# EAGLE board Flex (EAGLE 6.6.0)
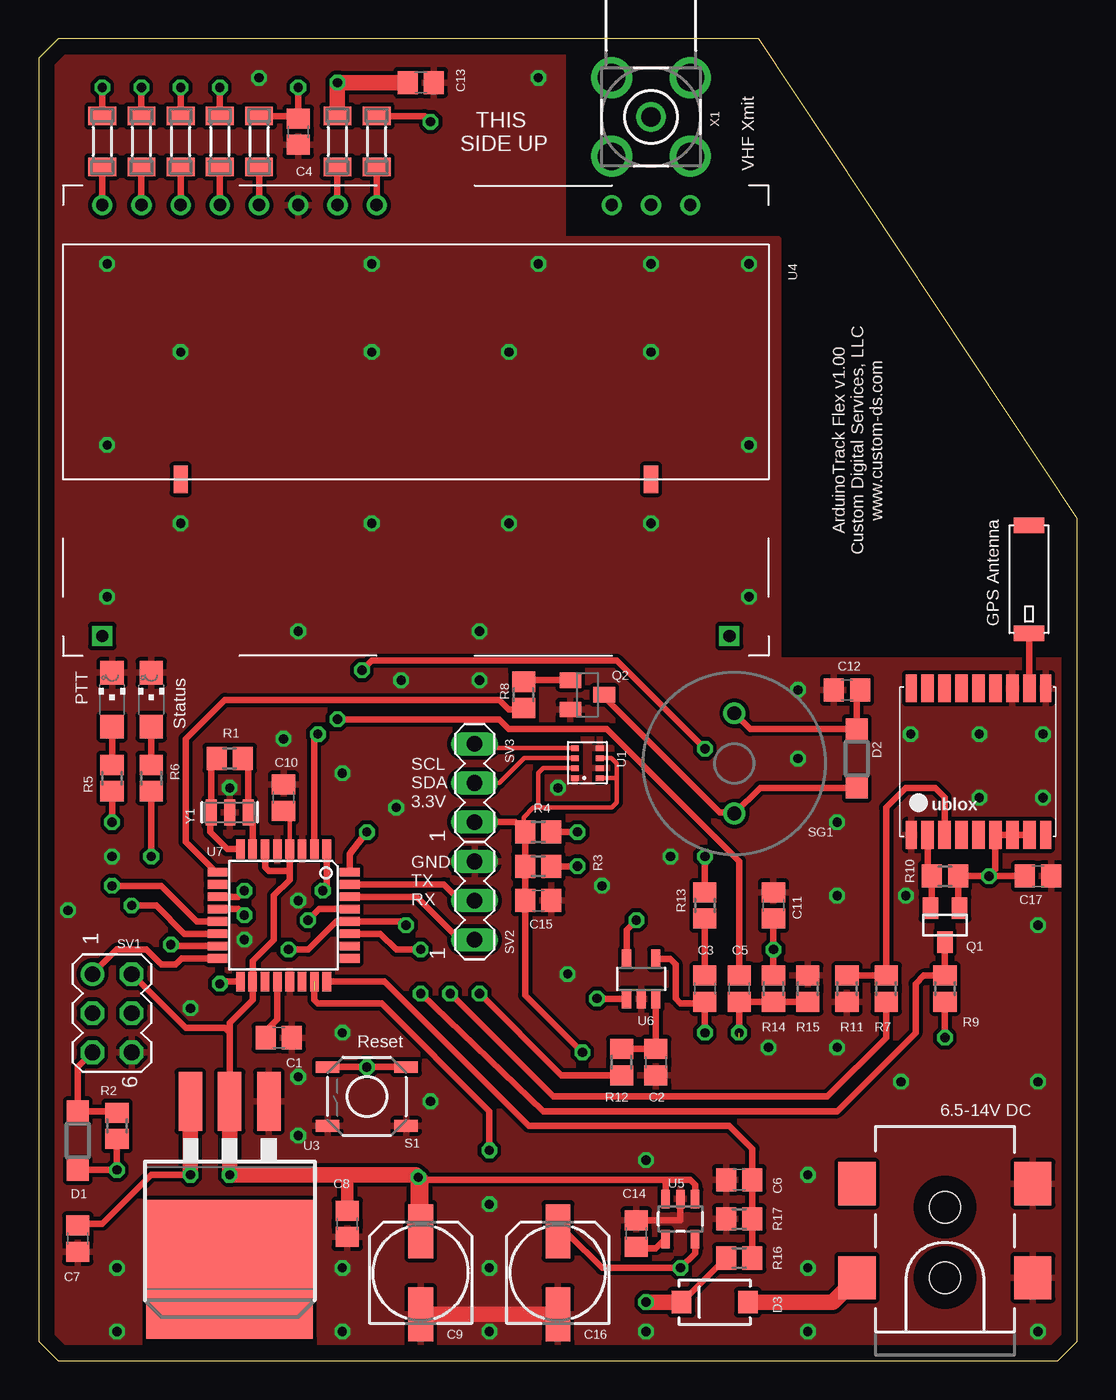
[diagram p0: board, top side]
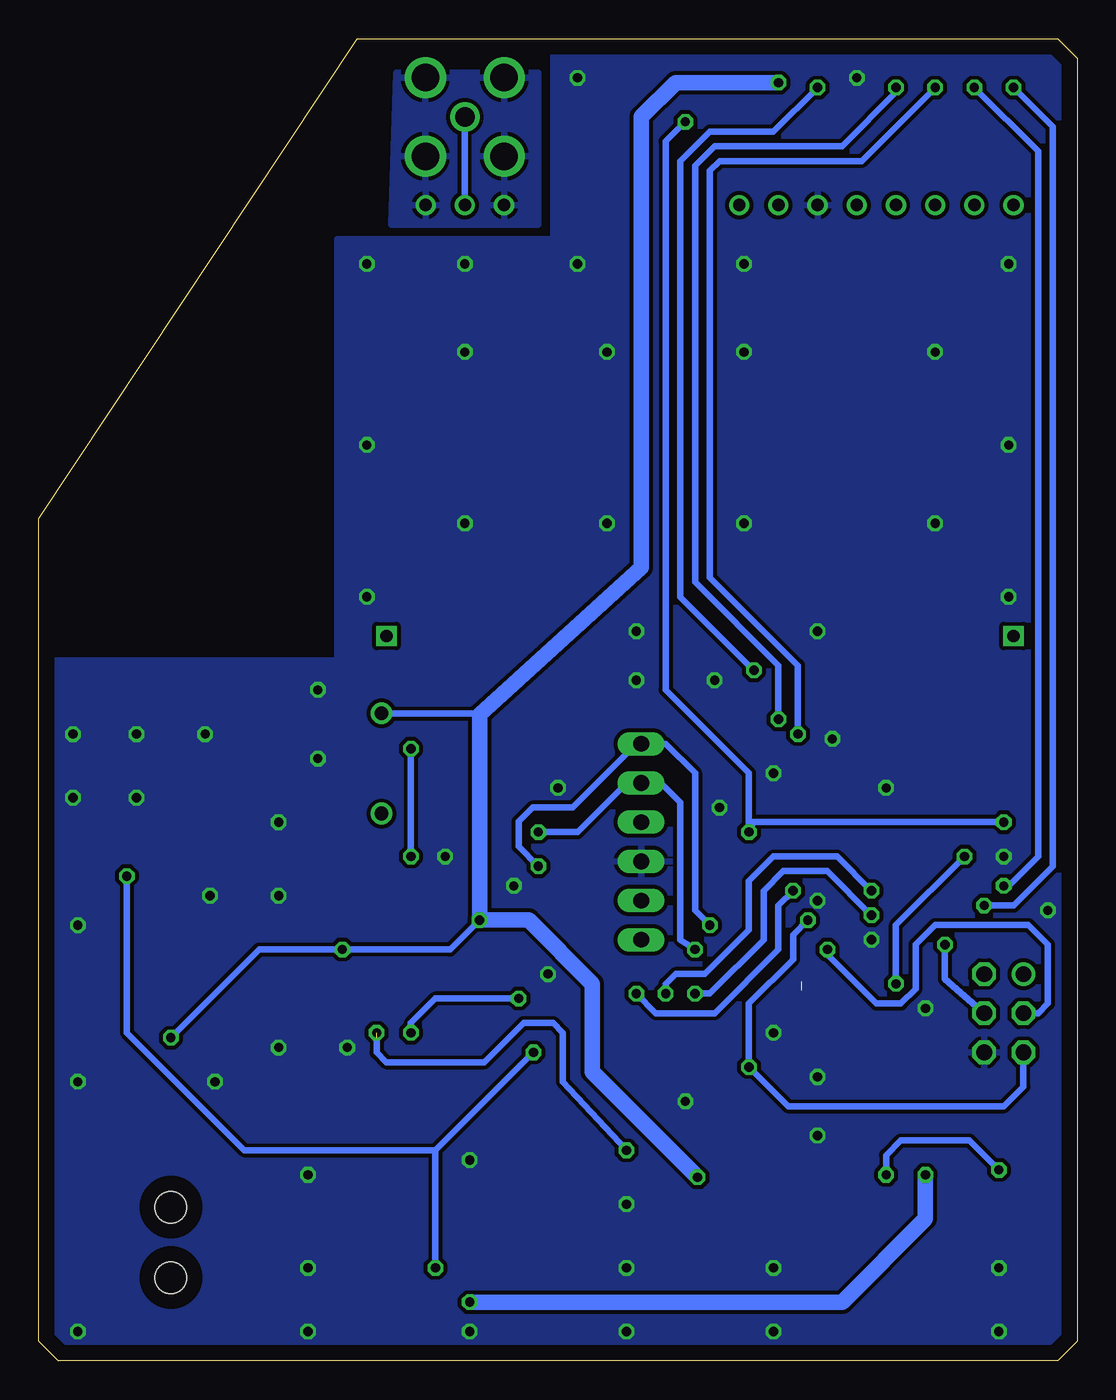
[diagram p1: board, bottom side, seen from below]

Size 67.31 x 85.72 mm. Coordinates in mm from the lower left corner, seen from the top.
Outline: 67.31,1.27 66.04,0 1.27,0 0,1.27 0,84.45 1.27,85.72 46.67,85.72 67.31,54.61 67.31,1.27
Copper layers (1*16): Top 0.035mm / dielectric 1.5mm / Bottom 0.035mm
Design rules "default *": minimum track width 10mil, minimum drill 23mil, track to track 10mil, track to pad 10mil, pad to pad 8mil, via to via 10mil, smd to smd 8mil, copper to edge 40mil, drill to drill 8mil, minimum pad ring 10mil, minimum via ring 8mil, stop-mask expansion 4mil, vias tented up to drill 0mil, thermal gap 10mil
Net classes: 1 Power: width 0.127 mm, clearance 0.025 mm

## Footprints (pad centres in the part's own frame; a part is rotated, then mirrored left to right if it is on the bottom)
1575AT43A40 = smd 1 x 2: FEED 0.5,-1; NC 7.5,-1
C0805 = smd 1.3 x 1.5: 1 -0.85,0; 2 0.85,0
153CLV-0605 = smd 3.5 x 1.6: + 2.7,0; - -2.7,0
SOD123 = smd 1.4 x 1.4: A 1.9,0; C -1.9,0
SMA-DIODE = smd 1.27 x 1.47: A -2.15,0; C 2.15,0
POWER_JACK_SMD = smd 2.8 x 2.4: GND 0,-5.7; P$4 6.1,-5.7; VIN0 0,5.7; VIN1 6.1,5.7 | hole 2.032: 0,0; 4.572,0
SM-1206 = smd 1.2 x 1.8: 1 -1.65,0; 2 1.65,0
CHIPLED_1206 = smd 1.5 x 1.5: A 0,-1.75; C 0,1.75
SOT23 = smd 1 x 1.4: 1 -0.95,-1.1; 2 0.95,-1.1; 3 0,1.1
SOT23-BEC = smd 1 x 1.4: B -0.95,-1.1; C 0,1.1; E 0.95,-1.1
R0805 = smd 1.3 x 1.5: 1 -0.85,0; 2 0.85,0
TACTILE_SWITCH_SMD = smd 1.524 x 0.762: 1 -2.54,1.905; 2 2.54,1.905; 3 -2.54,-1.905; 4 2.54,-1.905
BUZZER-12MM-NS = drill 0.9: + 3.25,0; - -3.25,0
MA03-2 = drill 1.016: 1 -2.54,-1.27 | drill 1.016 octagon: 2 -2.54,1.27; 3 0,-1.27; 4 0,1.27; 5 2.54,-1.27; 6 2.54,1.27
MA03-1 = drill 1.016 long: 1 -2.54,0; 2 0,0; 3 2.54,0
BMP280 = smd 0.5 x 0.35: P$1 0.8,0; P$2 0.8,-0.65; P$3 0.8,-1.3; P$4 0.8,-1.95; P$5 -0.8,-1.95; P$6 -0.8,-1.3; P$7 -0.8,-0.65; P$8 -0.8,0
UBLOX_MAX = smd 1.8 x 0.7: 1_GND 4.95,-4.4; 9_V_RESET 4.95,4.3; 10_GND -4.55,4.3; 18_RESERVED -4.55,-4.4 | smd 1.8 x 0.8: 2_TXD1 4.95,-3.35; 3_RXD1 4.95,-2.25; 4_TIMEPULSE 4.95,-1.15; 5_EXTINT0 4.95,-0.05; 6_V_BCKP 4.95,1.05; 7_VCC_IO 4.95,2.15; 8_VCC 4.95,3.25; 11_RF_IN -4.55,3.25; 12_GND -4.55,2.15; 13_ANTON -4.55,1.05; 14_VCC_RF -4.55,-0.05; 15_RESERVED -4.55,-1.15; 16_SDA2 -4.55,-2.25; 17_SCL2 -4.55,-3.35
TO263 = smd 1.524 x 3.81: 1 -2.54,-8.255; 2 0,-8.255; 3 2.54,-8.255 | smd 10.8 x 9: 4 0,2.635
RADIOMETRIX-HX1-CUSTOM = drill 0.8: ANTENNA -15.24,-12.7; ANTENNA_GND1 -17.78,-12.7; ANTENNA_GND2 -12.7,-12.7; GND 7.62,-12.7; POWER_SAVE 15.24,-12.7; PTT 2.54,-12.7; RX_AUDIO 12.7,-12.7; RX_DATA 17.78,-12.7; TX_AUDIO 10.16,-12.7; TX_DATA 20.32,-12.7; VCC 5.08,-12.7 | smd 0.914 x 1.778: N/C1 -15.24,5.08; N/C2 15.24,5.08 | drill 0.8 square: N/C3 -20.32,15.24; N/C4 20.32,15.24
SOT23-5 = smd 0.55 x 1.2: 1 -0.95,-1.3; 2 0,-1.3; 3 0.95,-1.3; 4 0.95,1.3; 5 -0.95,1.3
SOT23-5' = smd 0.6 x 1.2: 1 -0.95,-1.306; 2 0,-1.306; 3 0.95,-1.306; 4 0.95,1.306; 5 -0.95,1.306
TQFP32-08 = smd 1.27 x 0.559: 1 -4.293,2.8; 2 -4.293,2; 3 -4.293,1.2; 4 -4.293,0.4; 5 -4.293,-0.4; 6 -4.293,-1.2; 7 -4.293,-2; 8 -4.293,-2.8; 17 4.293,-2.8; 18 4.293,-2; 19 4.293,-1.2; 20 4.293,-0.4; 21 4.293,0.4; 22 4.293,1.2; 23 4.293,2; 24 4.293,2.8 | smd 0.559 x 1.27: 9 -2.8,-4.293; 10 -2,-4.293; 11 -1.2,-4.293; 12 -0.4,-4.293; 13 0.4,-4.293; 14 1.2,-4.293; 15 2,-4.293; 16 2.8,-4.293; 25 2.8,4.293; 26 2,4.293; 27 1.2,4.293; 28 0.4,4.293; 29 -0.4,4.293; 30 -1.2,4.293; 31 -2,4.293; 32 -2.8,4.293
BU-SMA-H = drill 1.27: 1 0,0 | drill 1.778: 2 -2.55,2.55; 3 2.55,2.55; 4 2.55,-2.55; 5 -2.55,-2.55
RESONATOR-SMD = smd 0.7 x 1.7: 1 -1.2,0; 2 0,0; 3 1.2,0

## Placement (x,y rotation side)
ANT1  GPS_ANT_SMDBAR  [1575AT43A40]  63.18,46.67 90 top
C1  .1uF  [C0805]  15.56,20.95 0 top
C2  10nF  [C0805]  40.01,19.37 270 top
C3  .1uF  [C0805]  43.18,24.13 90 top
C4  10nF  [C0805]  16.83,79.69 270 top
C5  .1uF  [C0805]  45.4,24.13 270 top
C6  .1uF  [C0805]  45.4,11.75 180 top
C7  .1uF  [C0805]  2.54,7.94 270 top
C8  .1uF  [C0805]  20,8.89 270 top
C9  47uF  [153CLV-0605]  24.77,5.71 90 top
C10  .1uF  [C0805]  15.88,36.51 90 top
C11  .1uF  [C0805]  47.62,29.53 90 top
C12  .1uF  [C0805]  52.39,43.5 180 top
C13  .1uF  [C0805]  24.77,82.87 0 top
C14  .1uF  [C0805]  38.73,8.26 90 top
C15  .1uF  [C0805]  32.38,29.84 0 top
C16  47uF  [153CLV-0605]  33.66,5.71 90 top
C17  .1uF  [C0805]  64.77,31.43 0 top
D1  [SOD123]  2.54,14.29 90 top
D2  [SOD123]  53.02,39.05 270 top
D3  B220/A  [SMA-DIODE]  43.81,3.81 180 top
J1  5.5x2.1mm Barrel  [POWER_JACK_SMD]  58.74,5.4 90 top
L1  160 ohm  [SM-1206]  21.91,79.06 90 top
L2  160 ohm  [SM-1206]  9.21,79.06 270 top
L3  160 ohm  [SM-1206]  4.13,79.06 270 top
L4  160 ohm  [SM-1206]  14.29,79.06 90 top
L5  160 ohm  [SM-1206]  11.75,79.06 270 top
L6  160 ohm  [SM-1206]  6.67,79.06 270 top
L7  160 ohm  [SM-1206]  19.37,79.06 90 top
LED1  Red  [CHIPLED_1206]  4.76,42.86 0 top
LED2  Green  [CHIPLED_1206]  7.3,42.86 0 top
Q1  MOSFET-NCHANNELBSS138  [SOT23]  58.74,28.26 180 top
Q2  2N2222  [SOT23-BEC]  35.56,43.18 270 top
R1  1M  [R0805]  12.38,39.05 0 top
R2  10k  [R0805]  5.08,15.24 270 top
R3  4.7k  [R0805]  32.38,32.07 180 top
R4  4.7k  [R0805]  32.38,34.29 180 top
R5  1k  [R0805]  4.76,37.78 90 top
R6  1k  [R0805]  7.3,37.78 90 top
R7  47k  [R0805]  54.93,24.13 270 top
R8  1k  [R0805]  31.43,43.18 90 top
R9  10k  [R0805]  58.74,24.13 270 top
R10  10k  [R0805]  58.74,31.43 0 top
R11  100k  [R0805]  52.39,24.13 90 top
R12  10k  [R0805]  37.78,19.37 90 top
R13  100  [R0805]  43.18,29.53 90 top
R14  10k  [R0805]  47.62,24.13 270 top
R15  10k  [R0805]  49.85,24.13 90 top
R16  100k  [R0805]  45.4,6.67 180 top
R17  47k  [R0805]  45.4,9.21 0 top
S1  [TACTILE_SWITCH_SMD]  21.27,17.14 180 top
SG1  BUZZERNS  [BUZZER-12MM-NS]  45.09,38.73 90 top
SV1  [MA03-2]  4.76,22.54 270 top
SV2  [MA03-1]  28.26,29.84 90 top
SV3  [MA03-1]  28.26,37.47 90 top
U1  BMP280  [BMP280]  35.56,37.78 180 top
U2  UBLOX_MAX  [UBLOX_MAX]  60.96,39.05 270 top
U3  LM1086  [TO263]  12.38,8.57 180 top
U4  RADIOMETRIX-HX1-CUSTOM  [RADIOMETRIX-HX1-CUSTOM]  24.45,62.23 180 top
U5  V_REG_LDOSMD  [SOT23-5]  41.59,9.21 180 top
U6  OPA725DBV  [SOT23-5']  39.05,24.77 0 top
U7  ATMega328  [TQFP32-08]  15.88,28.89 270 top
X1  BU-SMA-H  [BU-SMA-H]  39.69,80.64 90 top
Y1  16MHz  [RESONATOR-SMD]  12.38,35.56 180 top

## Library data of the parts
ANT1 = Parts; DIGIKEY: 712-1003-1-ND
C1 C3 C5-C8 C10-C15 C17 = resistor; DIGIKEY: 311-1361-1-ND
C2 C4 = resistor; DIGIKEY: 399-1158-1-ND
C9 C16 = resistor; DIGIKEY: PCE3842CT-ND
D1 D2 = diode; DIGIKEY: 1N4148W-FDICT-ND
D3 = SparkFun-DiscreteSemi; DIGIKEY: 641-1258-1-ND; PROD_ID: DIO-09886
J1 = SparkFun-Connectors; DIGIKEY: CP-002AHPJCT-ND; PROD_ID: CONN-08106
L1-L7 = inductor-neosid; DIGIKEY: 240-2411-1-ND; OC_FARNELL: unknown; OC_NEWARK: unknown
LED1 = led; DIGIKEY: 160-1405-1-ND
LED2 = led; DIGIKEY: 160-1169-1-ND
Q1 = SparkFun-DiscreteSemi; PROD_ID: TRANS-00830
Q2 = transistor-npn; DIGIKEY: MMBT2222AFSCT-ND
R1 = resistor; DIGIKEY: 311-1.0MARCT-ND
R2 R9 R10 R12 R14 R15 = resistor; DIGIKEY: 311-10.0KCRCT-ND
R3 R4 = resistor; DIGIKEY: 311-4.7KARCT-ND
R5 R6 R8 = resistor; DIGIKEY: 311-1.0KARCT-ND
R7 R17 = resistor; DIGIKEY: 311-47.0KCRCT-ND
R11 R16 = resistor; DIGIKEY: 311-100KCRCT-ND
R13 = resistor; DIGIKEY: 311-100ARCT-ND
S1 = SparkFun-Electromechanical; DIGIKEY: CKN9104CT-ND; PROD_ID: SWCH-08247
SG1 = SparkFun-Electromechanical; DIGIKEY: 102-1155-ND
SV1 = con-lstb; OC_FARNELL: unknown; OC_NEWARK: unknown
SV2 SV3 = con-lstb; DIGIKEY: 952-2264-ND; OC_FARNELL: unknown; OC_NEWARK: unknown
U1 U4 = custom-ds
U2 = Ava; ALT-PART: UBLOX MAX-M8Q
U3 = v-reg-2; DIGIKEY: LM1086ISX-5.0/NOPBCT-ND
U5 = SparkFun-PowerIC; DIGIKEY: LP3985IM5-3.3/NOPBCT-ND
U6 = linear
U7 = atmel; DIGIKEY: ATMEGA328P-15AZCT-ND; MPN: ATMEGA8-16AU; OC_FARNELL: 9171371; OC_NEWARK: 73M8863
X1 = con-coax; DIGIKEY: CONSMA001-ND; OC_FARNELL: unknown; OC_NEWARK: unknown
Y1 = SparkFun-FreqCtrl; DIGIKEY: 478-5420-1-ND; PROD_ID: XTAL-08900

## Nets
9_V_RESET: U2.9_V_RESET
+3V3: C15.1 C16.+ C17.1 Q1.1 R3.2 R4.2 R10.2 SV3.1 U1.P$2 U1.P$6 U1.P$8 U2.6_V_BCKP U2.7_VCC_IO U2.8_VCC U5.5
+5V [Power]: C8.1 C9.+ C10.1 C11.1 C12.1 C13.1 D1.C D2.C L7.2 R2.2 R9.2 R14.1 SG1.+ SV1.2 U3.2 U5.1 U5.3 U6.5 U7.4 U7.6 U7.18
ANA-RX-AUD: C5.2 R14.2 R15.1 U7.23
AUD-ANNUNC: R8.1 U7.9
BATT-SENSE: C6.1 R16.1 R17.2 U7.24
DIG-PTT: L1.2 R5.1 U7.32
DIG-XMIT-PS: L2.1 U7.2
GND [Power]: C1.2 C2.2 C4.2 C6.2 C7.2 C8.2 C9.- C10.2 C11.2 C12.2 C13.2 C14.2 C15.2 C16.- C17.2 J1.GND J1.P$4 LED1.C LED2.C Q2.E R11.1 R15.2 R17.1 S1.1 S1.2 SV1.6 SV2.3 U1.P$1 U1.P$5 U1.P$7 U2.1_GND U2.10_GND U2.12_GND U3.1 U4.GND U5.2 U6.2 U7.3 U7.5 U7.21 Y1.2
GPS-RX: Q1.3 R9.1 U7.12
GPS-TX: R7.2 U7.11
MISO: SV1.1 U7.16
MOSI: SV1.4 U7.15
N$1: C2.1 R12.2 U6.3
N$4: U4.ANTENNA X1.1
N$5: L4.1 U4.TX_AUDIO
N$7: L1.1 U4.PTT
N$8: D3.A J1.VIN0
N$9: D2.A Q2.C SG1.-
N$10: C4.1 L4.2 R13.2
N$11: C3.1 U6.1 U6.4
N$12: L5.2 U4.RX_AUDIO
N$13: R12.1 U7.1
N$14: L2.2 U4.POWER_SAVE
N$15: Q1.2 R10.1 U2.2_TXD1
N$16: ANT1.FEED U2.11_RF_IN
N$17: R1.1 U7.8 Y1.3
N$18: R7.1 R11.2 U2.3_RXD1
N$19: L6.2 U4.RX_DATA
N$20: L3.2 U4.TX_DATA
N$23: LED1.A R5.2
N$25: LED2.A R6.2
N$27: Q2.B R8.2
N$59: C1.1 U7.20
N$60: C14.1 U5.4
N$64: R1.2 U7.7 Y1.1
RESET: D1.A R2.1 S1.3 S1.4 SV1.5 U7.29
RFGND: U4.ANTENNA_GND1 U4.ANTENNA_GND2 X1.2 X1.3 X1.4 X1.5
RX-AUDIO: C5.1 L5.1
RXD: SV2.1 U7.30
SCK: R6.1 U7.17
SCL: R3.1 SV1.3 SV3.3 U1.P$4 U7.28
SDA: R4.1 SV3.2 U1.P$3 U7.27
TX-AUDIO: C3.2 R13.1
TXD: SV2.2 U7.31
V+ [Power]: C7.1 D3.C R16.2 U3.3
VCC: L7.1 U4.VCC
XCEIVER-RX: L3.1 U7.14
XCEIVER-TX: L6.1 U7.13

## Tracks (layer width: path | path; a pad name or v marks a point on that pad's centre or on a via)
+3V3  (via drill 0.6)
  Top 0.305: U1.P$6 37.12,39.08 37.47,38.73 37.47,37.78 | 37.47,37.78 37.47,36.2 37.15,35.88 32.38,35.88 | 32.38,35.88 32.07,35.88 31.43,35.24 31.43,34.92 31.17,34.66 | U1.P$8 37.47,37.78 | U1.P$2 32.72,38.43 32.38,38.1 32.38,35.88
  Top 0.406: 33.66,8.26 C16.+ 33.81,8.26 34.29,8.26 36.51,6.03 v41.59,6.03 42.54,6.98 U5.5 | U2.8_VCC U2.7_VCC_IO U2.6_V_BCKP 62.01,31.85 v61.59,31.43 | SV3.1 30.9,34.92 31.17,34.66 R4.2 R3.2 C15.1 31.54,23.71 v35.24,20 | Q1.1 59.59,29.46 R10.2 v61.59,31.43 | C17.1 v61.59,31.43
  Bottom 0.406: v61.59,31.43 61.59,21.27 53.98,13.65 41.59,13.65 | v35.24,20 41.59,13.65 | 41.59,13.65 v41.59,6.03
+5V  (via drill 0.6)
  Top 0.305: U7.4 16.27,35.43 C10.1
  Top 0.406: U5.1 42.55,11.43 42.23,11.75 40.64,11.75 | U7.4 16.27,31.75 | 16.27,31.75 16.27,31.2 15.24,30.16 15.24,27.3 13.88,25.94 U7.18 13.88,23.4 12.38,21.91 12.38,21.27 | U7.6 14.68,32 14.92,31.75 16.27,31.75 | SG1.+ 46.12,40.95 D2.C 53.02,43.28 C12.1 | 12.38,21.27 U3.2 | SV1.2 9.53,21.59 12.06,21.59 12.38,21.27 | U6.5 38.1,27.94 v38.73,28.57 | R14.1 v47.62,26.67 C11.1 | R9.2 v58.74,20.95 | R2.2 v5.08,12.38 v5.08,12.39 D1.C | 40.64,11.75 24.77,11.75 | U5.3 40.64,11.74 40.64,11.75
  Top 0.813: C8.1 20,12.06
  Top 1.016: U3.2 v12.38,12.06 20,12.06 24.45,12.06 v24.61,11.91 | 24.37,8.81 C9.+ | v24.61,11.91 24.77,11.75 C9.+ | L7.2 v19.37,82.87 C13.1 | v24.61,11.91 24.61,8.57 C9.+
  Bottom 0.406: v12.38,12.06 12.38,13.34 11.43,14.29 6.99,14.29 v5.08,12.38 | SG1.+ 38.81,41.98 38.73,41.91 | v58.74,20.95 53.02,26.67 v47.62,26.67 40.64,26.67 v38.73,28.57
  Bottom 1.016: v19.37,82.87 26.04,82.87 28.26,80.64 28.26,51.44 38.73,41.91 v38.73,28.57 35.56,28.57 31.43,24.45 31.43,18.73 v24.61,11.91
ANA-RX-AUD  (via drill 0.6)  (2 unrouted)
  Top 0.406: R15.1 R14.2 C5.2 v45.4,21.27 | 17.88,24.04 17.88,23.4 18.1,23.18 22.23,23.18 29.21,16.19 v29.21,13.65
  Bottom 0.406: v29.21,13.65 33.34,18.1 33.34,21.27 33.97,21.91 35.88,21.91 38.42,19.37 44.77,19.37 45.4,20 45.4,20.95
AUD-ANNUNC
  Top 0.406: U7.9 11.49,31.69 9.53,33.66 9.53,40.32 12.06,42.86 29.84,42.86 30.48,42.23 31.33,42.23 R8.1 31.85,42.55
BATT-SENSE
  Top 0.406: U7.24 22.39,24.6 31.75,15.24 44.77,15.24 46.25,13.76 C6.1 R17.2 R16.1
DIG-PTT  (via drill 0.6)
  Top 0.406: U7.32 20.17,32.87 v21.27,34.29 | R5.1 v4.76,34.92 | L1.2 25.02,80.71 v25.4,80.33
  Bottom 0.406: v4.76,34.92 20.95,34.92 v21.27,34.29 21.27,38.1 26.67,43.5 26.67,79.06 v25.4,80.33
DIG-XMIT-PS  (via drill 0.6)
  Top 0.406: L2.1 v9.21,82.55 | U7.2 17.88,40.42 v18.1,40.64
  Bottom 0.406: v18.1,40.64 18.1,45.09 23.81,50.8 23.81,77.15 23.18,77.79 13.97,77.79 v9.21,82.55
GND  (via drill 0.6)
  Top 0.406: C14.2 41.59,9.11 U5.2
  Top 1.016: C16.- 25.37,3.02
  other vias: 46.04,59.37 32.38,71.12 30.48,65.41 4.45,59.37 21.59,65.41 21.59,54.29 39.69,71.12 9.21,54.29 28.57,47.31 16.83,47.31 30.48,54.29 13.34,27.3 39.69,65.41 46.04,71.12 4.45,49.53 60.96,40.64 32.38,83.19 46.04,49.53 29.21,10.16 21.59,71.12 9.21,65.41 65.09,36.51 49.21,43.5 19.68,38.1 23.5,44.13 36.51,30.8 56.2,30.16 64.77,18.1 40.96,32.7 51.75,30.16 28.57,44.13 51.75,34.92 4.76,32.7 49.85,1.91 64.77,1.91 39.37,1.91 29.21,1.91 19.68,1.91 5.08,1.91 19.68,6.03 29.21,6.03 49.85,6.03 12.38,37.15 16.83,29.84 64.77,28.26 1.91,29.21 25.4,16.83 16.83,14.61 19.68,21.27 5.08,6.03 55.88,18.1 51.75,20.32 49.21,39.05 14.29,83.19 39.69,54.29 15.88,40.32 23.18,35.88 65.09,40.64 33.66,37.15 56.52,40.64 9.84,22.86 16.83,18.41 34.29,25.08 47.31,20.32 49.85,12.06 39.37,13.02 4.45,71.12 60.96,36.51
  pour Bottom (isolate 0.254): 0.32,1.59 1.59,0.32 66.04,0.32 66.99,1.27 66.99,45.4 47.94,45.4 47.94,72.71 33.97,72.71 33.97,85.41 1.59,85.41 0.32,84.14
  pour Top (isolate 0.254): 66.99,45.4 47.94,45.4 47.94,72.71 33.97,72.71 33.97,85.41 1.59,85.41 0.32,84.14 0.32,1.59 1.59,0.32 66.04,0.32 66.99,1.27
GPS-RX  (via drill 0.6)
  Top 0.406: U7.12 12.94,29.29 v13.34,28.89 | v24.77,23.81 32.7,16.19 51.75,16.19 56.83,21.27 56.83,24.45 57.37,24.98 R9.1 Q1.3
  Bottom 0.406: v13.34,28.89 16.19,31.75 19.05,31.75 20.32,30.48 20.32,27.3 23.81,23.81 v24.77,23.81
GPS-TX  (via drill 0.6)
  Top 0.406: U7.11 12.95,30.09 v13.34,30.48 | R7.2 54.93,20.95 51.12,17.14 33.34,17.14 v26.67,23.81
  Bottom 0.406: v13.34,30.48 15.56,32.7 19.68,32.7 21.27,31.11 21.27,27.94 24.13,25.08 26.04,25.08 26.67,24.45 v26.67,23.81
MISO
  Top 0.406: U7.16 9.27,26.09 8.89,25.72 7.94,25.72 6.99,26.67 5.08,26.67 SV1.1
MOSI  (via drill 0.6)
  Top 0.406: U7.15 8.67,26.89 v8.57,26.99
  Bottom 0.406: v8.57,26.99 8.57,24.77 SV1.4
N$1
  Top 0.406: U6.3 C2.1 R12.2
N$4
  Bottom 0.406: U4.ANTENNA X1.1
N$5
  Top 0.406: L4.1 U4.TX_AUDIO
N$7
  Top 0.406: L1.1 U4.PTT
N$8
  Top 1.016: D3.A 51.45,3.81 J1.VIN0
N$9
  Top 0.406: D2.A 46.75,37.15 SG1.- 45.01,35.56 44.13,35.56 36.66,43.03 Q2.C
N$10  (via drill 0.6)
  Top 0.406: L4.2 16.66,80.71 C4.1 v16.83,82.55 | v20.95,44.77 21.59,45.4 37.47,45.4 v43.18,39.69 | v43.18,32.7 R13.2
  Bottom 0.406: v16.83,82.55 19.68,79.69 23.81,79.69 25.72,77.79 25.72,49.53 v20.95,44.77 | v43.18,39.69 v43.18,32.7
N$11  (via drill 0.6)
  Top 0.406: U6.4 40.92,26.07 41.27,25.72 41.27,23.5 41.59,23.18 43.08,23.18 C3.1 v43.18,21.27 | U6.1 36.23,23.46 v36.2,23.5
  Bottom 0.406: v36.2,23.5 41.59,23.5 43.18,21.91 v43.18,21.27
N$12
  Top 0.406: L5.2 U4.RX_AUDIO
N$13  (via drill 0.6)
  Top 0.406: U7.1 18.68,30.74 v18.41,30.48 | R12.1 33.87,18.52 v28.57,23.81
  Bottom 0.406: v18.41,30.48 19.37,29.53 19.37,26.67 23.5,22.54 27.3,22.54 v28.57,23.81
N$14
  Top 0.406: L2.2 U4.POWER_SAVE
N$15
  Top 0.406: U2.2_TXD1 57.61,31.71 R10.1 57.89,29.46 Q1.2
N$16
  Top 0.406: U2.11_RF_IN 64.21,47.15 ANT1.FEED
N$17
  Top 0.406: U7.8 12.22,33.19 11.11,34.29 11.11,35.49 Y1.3 11.18,38.7 R1.1
N$18
  Top 0.406: U2.3_RXD1 58.71,36.54 58.1,37.15 56.2,37.15 54.93,35.88 R7.1 R11.2
N$19
  Top 0.406: L6.2 U4.RX_DATA
N$20
  Top 0.406: L3.2 U4.TX_DATA
N$23
  Top 0.406: LED1.A R5.2
N$25
  Top 0.406: LED2.A R6.2
N$27
  Top 0.406: Q2.B 31.53,44.13 R8.2
N$59
  Top 0.406: U7.20 15.47,22.14 14.92,21.59 14.92,21.17 C1.1
N$60
  Top 0.406: U5.4 40.61,7.91 40.01,7.3 38.84,7.3 C14.1
N$64
  Top 0.406: U7.7 13.88,35.27 Y1.1 13.58,38.7 R1.2
RESET  (via drill 0.6)
  Top 0.406: R2.1 4.98,16.19 D1.A 2.54,19.05 SV1.5 | S1.4 v21.27,19.05 S1.3 | U7.29 18.18,29.29 v17.46,28.57
  Bottom 0.406: SV1.5 3.49,17.78 4.76,16.51 18.73,16.51 v21.27,19.05 21.27,23.18 18.41,26.04 18.41,27.62 v17.46,28.57
RFGND
  pour Bottom: 34.92,83.5 34.92,73.66 44.45,73.66 44.13,83.5
RX-AUDIO  (via drill 0.6)
  Top 0.406: C5.1 45.4,32.38 36.83,40.96 30.48,40.96 29.84,41.59 v19.37,41.59 | L5.1 v11.75,82.55
  Bottom 0.406: v11.75,82.55 11.75,82.23 15.24,78.74 23.5,78.74 24.77,77.47 24.77,50.48 19.37,45.09 v19.37,41.59
RXD
  Top 0.406: U7.30 24.52,30.09 27.3,27.3 SV2.1
SCK  (via drill 0.6)
  Top 0.406: U7.17 11.9,24.6 v11.75,24.45 | v7.3,32.7 R6.1
  Bottom 0.406: v11.75,24.45 11.75,28.26 v7.3,32.7
SCL  (via drill 0.6)
  Top 0.305: U1.P$4 28.53,39.73 SV3.3
  Top 0.406: R3.1 v34.92,32.07 | v16.19,26.67 17.46,26.67 19.29,28.49 U7.28 23.58,28.49 v23.81,28.26
  Bottom 0.406: v34.92,32.07 36.2,33.34 36.2,34.97 35.29,35.88 32.7,35.88 28.85,39.73 28.53,39.73 SV3.3 26.67,40.01 24.77,38.1 24.77,29.21 v23.81,28.26 | v16.19,26.67 16.19,26.35 13.02,23.18 11.43,23.18 10.48,24.13 10.48,26.99 9.21,28.26 3.17,28.26 1.91,26.99 1.91,23.18 2.54,22.54 SV1.3
SDA  (via drill 0.6)
  Top 0.305: U1.P$3 31.46,39.08 29.84,37.47 SV3.2
  Top 0.406: R4.1 v34.92,34.29 | U7.27 22.16,27.69 23.18,26.67 v24.77,26.67
  Bottom 0.406: v34.92,34.29 32.38,34.29 29.21,37.47 SV3.2 26.99,37.47 25.72,36.2 25.72,27.3 v24.77,26.67
TX-AUDIO
  Top 0.406: R13.1 C3.2
TXD
  Top 0.406: U7.31 26.26,30.89 27.3,29.84 SV2.2
V+  (via drill 0.6)
  Top 0.406: R16.2 44.52,6.67 D3.C | v9.84,12.06 7.3,12.06 4.13,8.89 2.64,8.89 C7.1
  Top 1.016: D3.C v39.37,3.81 | U3.3 v9.84,12.06
  Bottom 1.016: v39.37,3.81 15.24,3.81 9.84,9.21 v9.84,12.06
VCC
  Top 0.406: L7.1 U4.VCC
XCEIVER-RX  (via drill 0.6)
  Top 0.406: v4.13,82.55 L3.1 | U7.14 9.46,27.69 7.62,29.53 v6.03,29.53
  Bottom 0.406: v6.03,29.53 4.13,29.53 1.59,32.07 1.59,80.01 v4.13,82.55
XCEIVER-TX  (via drill 0.6)
  Top 0.406: v6.67,82.55 L6.1 | U7.13 10.24,28.49 7.94,30.8 v4.76,30.8
  Bottom 0.406: v4.76,30.8 4.45,30.8 2.54,32.7 2.54,78.42 v6.67,82.55

## Text on the board
tNames: THIS / SIDE UP | VHF Xmit | ArduinoTrack Flex v1.00 / Custom Digital Services, LLC / www.custom-ds.com | GPS Antenna | PTT | Status | SCL / SDA / 3.3V | GND / TX / RX | Reset | 6.5-14V DC